# EAGLE board dcc-promini (EAGLE 6.6.0)
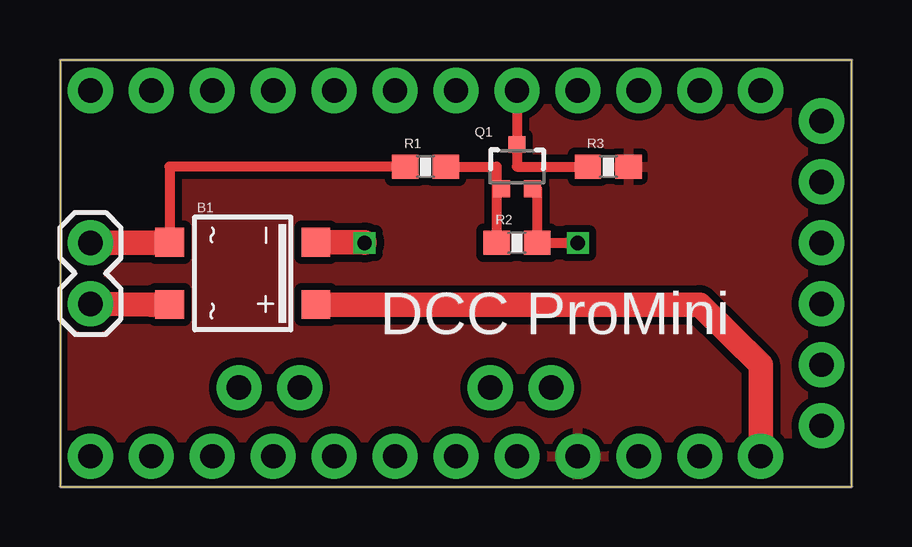
[diagram p0: board, top side]
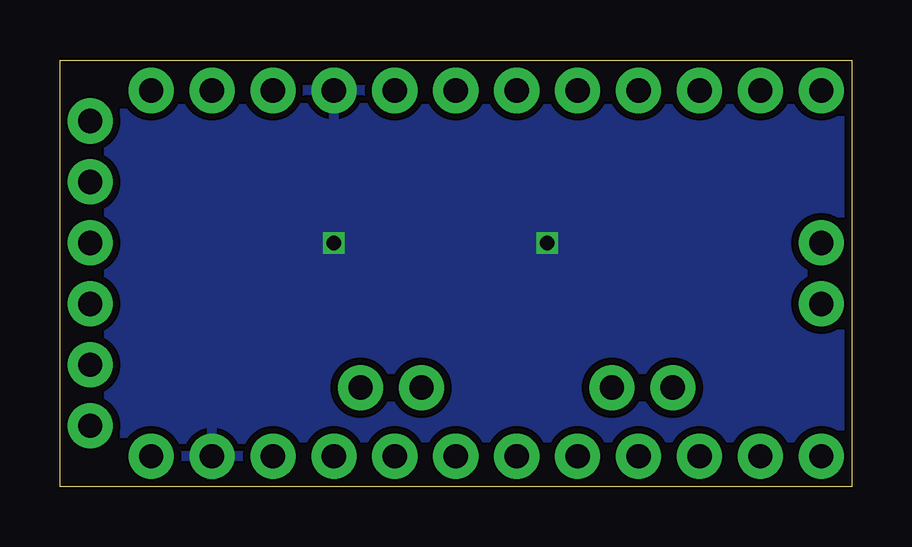
[diagram p1: board, bottom side, seen from below]

Size 33.01 x 17.78 mm. Coordinates in mm from the lower left corner, seen from the top.
Outline: 0,17.78 0,0 33.01,0 33.01,17.78 0,17.78
Copper layers (1*2*15*16): Top 0.035mm / dielectric 0.2mm / layer 2 0.0175mm / dielectric 1.1mm / layer 15 0.0175mm / dielectric 0.2mm / Bottom 0.035mm
Design rules "SeeedStudio_DRU_no_angle_20130527": minimum track width 6mil, minimum drill 12mil, track to track 6mil, track to pad 6mil, pad to pad 6mil, via to via 6mil, smd to smd 0mil, copper to edge 10mil, drill to drill 10mil, minimum pad ring 6mil, minimum via ring 6mil, stop-mask expansion 2mil, vias tented up to drill 25mil, thermal gap 10mil

## Footprints (pad centres in the part's own frame; a part is rotated, then mirrored left to right if it is on the bottom)
SOIC-4 = smd 1.2 x 1.2: + 1.3,3.05; - -1.3,3.05; ~1 -1.3,-3.05; ~2 1.3,-3.05
1X02 = drill 1.016 pad 1.88: 1 0,0; 2 2.54,0
SOT323 = smd 0.7 x 0.7: 1 -0.65,-0.925; 2 0.65,-0.925; 3 0,0.925
0603-RES = smd 1.1 x 1: 1 -0.85,0; 2 0.85,0
ARDUINO_PRO_MINI = drill 1.016 pad 1.88: 1 -7.62,12.7; 2 -7.62,10.16; 3 -7.62,7.62; 4 -7.62,5.08; 5 -7.62,2.54; 6 -7.62,0; 7 -7.62,-2.54; 8 -7.62,-5.08; 9 -7.62,-7.62; 10 -7.62,-10.16; 11 -7.62,-12.7; 12 -7.62,-15.24; 13 7.62,-15.24; 14 7.62,-12.7; 15 7.62,-10.16; 16 7.62,-7.62; 17 7.62,-5.08; 18 7.62,-2.54; 19 7.62,0; 20 7.62,2.54; 21 7.62,5.08; 22 7.62,7.62; 23 7.62,10.16; 24 7.62,12.7; A4 4.763,1.429; A5 4.763,3.969; A6 4.763,-9.049; A7 4.763,-6.509; BLK -6.35,15.24; GND -3.81,15.24; GRN 6.35,15.24; RXI 1.27,15.24; TXO 3.81,15.24; VCC -1.27,15.24

## Placement (x,y rotation side)
B1  MB1S  [SOIC-4]  7.62,8.89 270 top
DCC-IN  M02PTH  [1X02]  1.27,7.62 90 top
Q1  MOSFET-NCHANNEL2N7002PW  [SOT323]  19.05,13.34 0 top
R1  47K  [0603-RES]  15.24,13.34 0 top
R2  100K  [0603-RES]  19.05,10.16 0 top
R3  10K  [0603-RES]  22.86,13.34 0 top
U$1  ARDUINO_PRO_MINI  [ARDUINO_PRO_MINI]  16.51,8.89 270 top

## Library data of the parts
B1 = rectifier
DCC-IN = SparkFun-Connectors
Q1 = SparkFun-DiscreteSemi; PROD_ID: TRANS-11151
R1-R3 = SparkFun-Passives
U$1 = SparkFun-Boards

## Nets
5V: R3.2 U$1.21
DCC-INT: Q1.3 R3.1 U$1.5
GND: B1.- Q1.2 R2.2 U$1.4 U$1.23
N$1: Q1.1 R1.2 R2.1
N$3: B1.~1 DCC-IN.2 R1.1
N$4: B1.~2 DCC-IN.1
SCL: U$1.A5
SDA: U$1.A4
VRAW: B1.+ U$1.24

## Tracks (layer width: path | path; a pad name or v marks a point on that pad's centre or on a via)
5V
  pour Top (isolate 0.305): 0,17.78 33.02,17.78 33.02,0 0,0
DCC-INT
  Top 0.406: R3.1 19.05,13.34 Q1.3 U$1.5
GND  (via drill 0.6)
  Top 0.406: Q1.2 19.9,12.41 R2.2 v21.59,10.16
  Top 1.016: B1.- 12.7,10.19 v12.7,10.16
  pour Bottom (isolate 0.305): 0,17.78 33.02,17.78 33.02,0 0,0
N$1
  Top 0.406: R1.2 18.2,13.34 18.2,12.41 | 18.2,12.41 R2.1 | Q1.1 18.2,12.41
N$3
  Top 0.406: R1.1 4.57,13.34 B1.~1
  Top 1.016: DCC-IN.2 4.54,10.16 B1.~1
N$4
  Top 0.406: DCC-IN.1 1.27,7.59
  Top 1.016: DCC-IN.1 3.81,7.59 B1.~2
VRAW
  Top 1.016: B1.+ 26.67,7.59 29.21,5.08 U$1.24

## Text on the board
tPlace: DCC ProMini